# Allegro board FootPeda-4l.brd
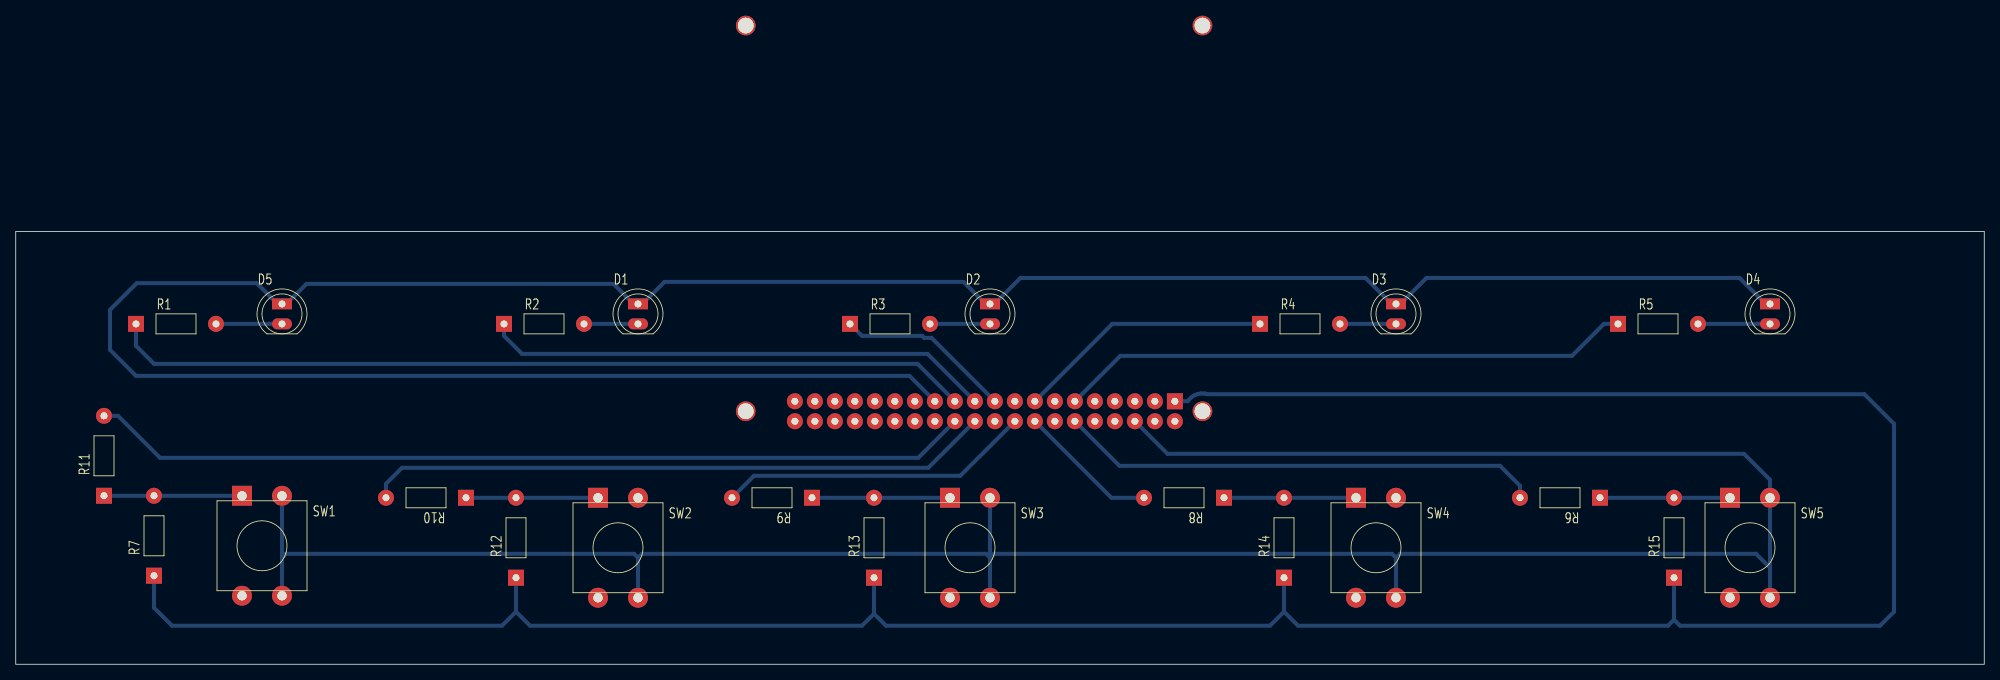
[diagram p0: board, top side]
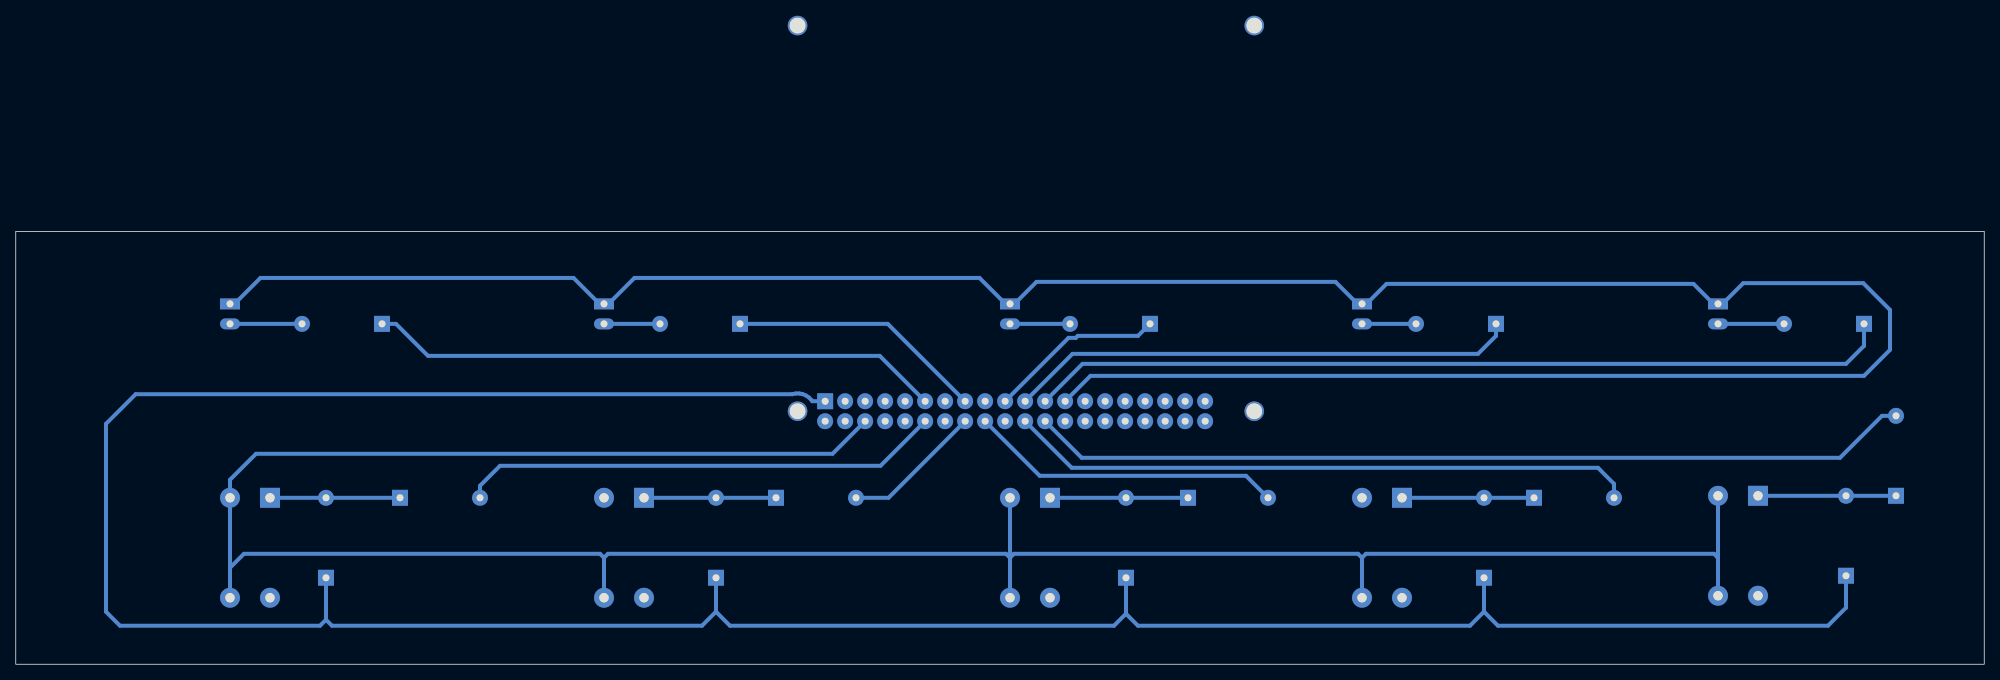
[diagram p1: board, bottom side, seen from below]

Outline 250 x 55 mm; copper layers: TOP, BOTTOM. Coordinates in mm from the lower left corner of the outline.
Outline path: rectangle 0,0 250,55

## Design rules (mm)
constraint set DEFAULT: min track width 0.508

## Placement (name value [footprint] x y rotation side)
D1  LED  [GU-LED5MM]  79.03 45.79 0 top
D2  LED  [GU-LED5MM]  123.73 45.79 0 top
D3  LED  [GU-LED5MM]  175.29 45.79 0 top
D4  LED  [GU-LED5MM]  222.79 45.79 0 top
D5  LED  [GU-LED5MM]  33.81 45.79 0 top
R1  330R  [GU-RC400]  15.27 43.25 0 top
R2  330R  [GU-RC400]  62.01 43.25 0 top
R3  330R  [GU-RC400]  105.95 43.25 0 top
R4  330R  [GU-RC400]  158.02 43.25 0 top
R5  330R  [GU-RC400]  203.49 43.25 0 top
R6  1K  [GU-RC400]  201.2 21.15 180 top
R7  10K  [GU-RC400]  17.56 11.24 90 top
R8  1K  [GU-RC400]  153.45 21.15 180 top
R9  1K  [GU-RC400]  101.12 21.15 180 top
R10  1K  [GU-RC400]  57.18 21.15 180 top
R11  1K  [GU-RC400]  11.21 21.4 90 top
R12  10K  [GU-RC400]  63.53 10.99 90 top
R13  10K  [GU-RC400]  109 10.99 90 top
R14  10K  [GU-RC400]  161.07 10.99 90 top
R15  10K  [GU-RC400]  210.6 10.99 90 top
SW1  Pushbutton-4pin  [GU-PUSH52]  28.73 21.4 0 top
SW2  Pushbutton-4pin  [GU-PUSH52]  73.95 21.15 0 top
SW3  Pushbutton-4pin  [GU-PUSH52]  118.65 21.15 0 top
SW4  Pushbutton-4pin  [GU-PUSH52]  170.21 21.15 0 top
SW5  Pushbutton-4pin  [GU-PUSH52]  217.71 21.15 0 top
U1  Raspberry Pi B+  [GU-RASP-PI-3]  154.21 84.65 180 top

## Library data of the parts
D1-D5 = LED
R1-R15 = RESISTOR_1
SW1-SW5 = Pushbutton-4pin
U1 = Raspberry Pi B+_2

## Footprints (pads in the part's own frame, mm; a bottom-side part is the same pattern mirrored in y, then rotated)
GU-LED5MM
  rect 2.54x1.397 hole 0.889: 1(0,0)
  oval 2.54x1.397 hole 0.889: 2(0,-2.54)
GU-PUSH52
  rect 2.54x2.54 hole 1.194: 1(0,0)
  round 2.54 hole 1.194: 2(5.08,0) 3(0,-12.7) 4(5.08,-12.7)
GU-RASP-PI-3
  round 2.5 hole 2 unplated: (3.5,52.5) (3.5,3.5) (61.5,52.5) (61.5,3.5)
  rect 2.032x2.032 hole 0.889: 1(7,51.23)
  round 2.032 hole 0.889: 2(7,53.77) 3(9.54,51.23) 4(9.54,53.77) 5(12.08,51.23) 6(12.08,53.77) 7(14.62,51.23) 8(14.62,53.77) 9(17.16,51.23) 10(17.16,53.77) 11(19.7,51.23) 12(19.7,53.77) 13(22.24,51.23) 14(22.24,53.77) 15(24.78,51.23) 16(24.78,53.77) 17(27.32,51.23) 18(27.32,53.77) 19(29.86,51.23) 20(29.86,53.77) 21(32.4,51.23) 22(32.4,53.77) 23(34.94,51.23) 24(34.94,53.77) 25(37.48,51.23) 26(37.48,53.77) 27(40.02,51.23) 28(40.02,53.77) 29(42.56,51.23) 30(42.56,53.77) 31(45.1,51.23) 32(45.1,53.77) 33(47.64,51.23) 34(47.64,53.77) 35(50.18,51.23) 36(50.18,53.77) 37(52.72,51.23) 38(52.72,53.77) 39(55.26,51.23) 40(55.26,53.77)
GU-RC400
  rect 2.032x2.032 hole 0.889: 1(0,0)
  round 2.032 hole 0.889: 2(10.16,0)

## Nets
3V3: R7.1 R12.1 R13.1 R14.1 R15.1 U1.1
GND: D1.1(CATHODE) D2.1(CATHODE) D3.1(CATHODE) D4.1(CATHODE) D5.1(CATHODE) SW1.2 SW1.4 SW2.2 SW2.4 SW3.2 SW3.4 SW4.2 SW4.4 SW5.2 SW5.4 U1.6 U1.9 U1.20 U1.25 U1.30 U1.34 U1.39
P3V3: U1.17
P5V: U1.2 U1.4(P5V#4)
GPIO8: R11.2 U1.24
GPIO9: R2.1 U1.21
GPIO10: R3.1 U1.19
GPIO11: R1.1 U1.23
GPIO17: R5.1 U1.11
GPIO18: R6.2 U1.12
GPIO21: U1.40
GPIO22: R4.1 U1.15
GPIO23: R8.2 U1.16
GPIO24: R9.2 U1.18
GPIO25: R10.2 U1.22
N00282: D5.2 R1.2
N00301: D1.2 R2.2
N00309: D2.2 R3.2
N00319: D3.2 R4.2
N00325: D4.2 R5.2
N00579: R8.1 R14.2 SW4.1 SW4.3
N00595: R9.1 R13.2 SW3.1 SW3.3
N00610: R10.1 R12.2 SW2.1 SW2.3
N00675: R7.2 R11.1 SW1.1 SW1.3
N00686: R6.1 R15.2 SW5.1 SW5.3
N19324: U1.14

Pads without a net: U1 3 5 7 8 10 13 26 27 28 29 31 32 33 35 36 37 38

## Routing (per net, layer and track width the routed paths; a pad name or vN(x,y) marks a point on that pad's centre or on a via; arc(x,y) is an arc through that point)
3V3: length 367.2
  BOTTOM w0.508: 63.53,6.67 65.31,4.89 107.47,4.89 109,6.42 ; 63.53,6.67 R12.1 ; 63.53,6.67 61.75,4.89 19.84,4.89 17.56,7.18 R7.1 ; 161.07,6.67 162.85,4.89 209.84,4.89 210.6,5.66 ; 161.07,6.67 R14.1 ; 161.07,6.67 159.29,4.89 110.52,4.89 109,6.42 ; R13.1 109,6.42 ; U1.1 148.85,33.42 148.96,33.59 149.27,33.9 149.64,34.15 150.05,34.32 150.49,34.4 150.93,34.4 151.37,34.32 234.77,34.32 238.54,30.55 238.54,6.67 236.76,4.89 211.36,4.89 210.6,5.66 ; 210.6,5.66 R15.1
GND: length 661.2
  BOTTOM w0.508: D4.1 222.22,45.79 218.92,49.09 179.17,49.09 175.86,45.79 D3.1 174.72,45.79 171.42,49.09 127.6,49.09 124.3,45.79 D2.1 123.16,45.79 120.36,48.58 82.39,48.58 79.6,45.79 D1.1 78.45,45.79 75.91,48.33 36.93,48.33 34.39,45.79 D5.1 33.24,45.79 30.61,48.42 15.37,48.42 11.97,45.03 11.97,39.95 15.27,36.64 113.51,36.64 U1.25 ; 175.29,13.53 174.78,14.04 124.24,14.04 123.73,13.53 ; 175.29,13.53 SW4.4 ; 175.29,13.53 175.8,14.04 221.01,14.04 222.79,12.26 ; U1.6 146.27,26.74 219.49,26.74 222.79,23.44 SW5.2 222.79,12.26 ; SW3.2 123.73,13.53 ; 123.73,13.53 SW3.4 ; 123.73,13.53 123.22,14.04 79.53,14.04 79.03,13.53 ; SW1.4 33.81,13.53 33.94,13.66 ; 222.79,12.26 SW5.4 ; 33.94,13.66 34.32,14.04 78.52,14.04 79.03,13.53 ; 33.94,13.66 33.81,13.78 SW1.2 ; 79.03,13.53 SW2.4
GPIO8: length 112.2
  BOTTOM w0.508: R11.2 12.99,31.56 18.32,26.23 114.62,26.23 U1.24
GPIO9: length 64.8
  BOTTOM w0.508: R2.1 62.01,41.72 64.29,39.44 115.79,39.44 U1.21
GPIO10: length 22.5
  BOTTOM w0.508: U1.19 116.3,41.47 115.37,41.47 115.12,41.72 107.47,41.72 R3.1
GPIO11: length 109.7
  BOTTOM w0.508: R1.1 15.27,40.45 17.56,38.17 114.52,38.17 U1.23
GPIO17: length 73
  BOTTOM w0.508: U1.11 140.27,39.18 197.64,39.18 201.71,43.25 R5.1
GPIO18: length 61.5
  BOTTOM w0.508: R6.2 191.04,22.67 188.5,25.21 140.18,25.21 U1.12
GPIO22: length 32.7
  BOTTOM w0.508: U1.15 139.26,43.25 R4.1
GPIO23: length 17.9
  BOTTOM w0.508: R8.2 139.16,21.15 U1.16
GPIO24: length 40
  BOTTOM w0.508: U1.18 119.95,23.94 93.76,23.94 R9.2
GPIO25: length 79.9
  BOTTOM w0.508: R10.2 47.02,22.93 49.05,24.96 115.89,24.96 U1.22
N00282: length 8.4
  BOTTOM w0.508: D5.2 R1.2
N00301: length 6.9
  BOTTOM w0.508: D1.2 R2.2
N00309: length 7.6
  BOTTOM w0.508: D2.2 R3.2
N00319: length 7.1
  BOTTOM w0.508: D3.2 R4.2
N00325: length 9.1
  BOTTOM w0.508: D4.2 R5.2
N00579: length 16.8
  BOTTOM w0.508: R8.1 R14.2 SW4.1
N00595: length 17.5
  BOTTOM w0.508: SW3.1 R13.2 R9.1
N00610: length 16.8
  BOTTOM w0.508: SW2.1 R12.2 R10.1
N00675: length 17.5
  BOTTOM w0.508: R11.1 R7.2 SW1.1
N00686: length 16.5
  BOTTOM w0.508: SW5.1 R15.2 R6.1
